# Altium PCB Memory-A2.PcbDoc
Units mil, origin at the board's own origin, x right, y up, seen from the top; angles counter-clockwise.
Board outline 1315 x 1305 mil, 2 copper layers (Top Layer, Bottom Layer); 17 components, 13 nets, 88 pads, 27 vias.
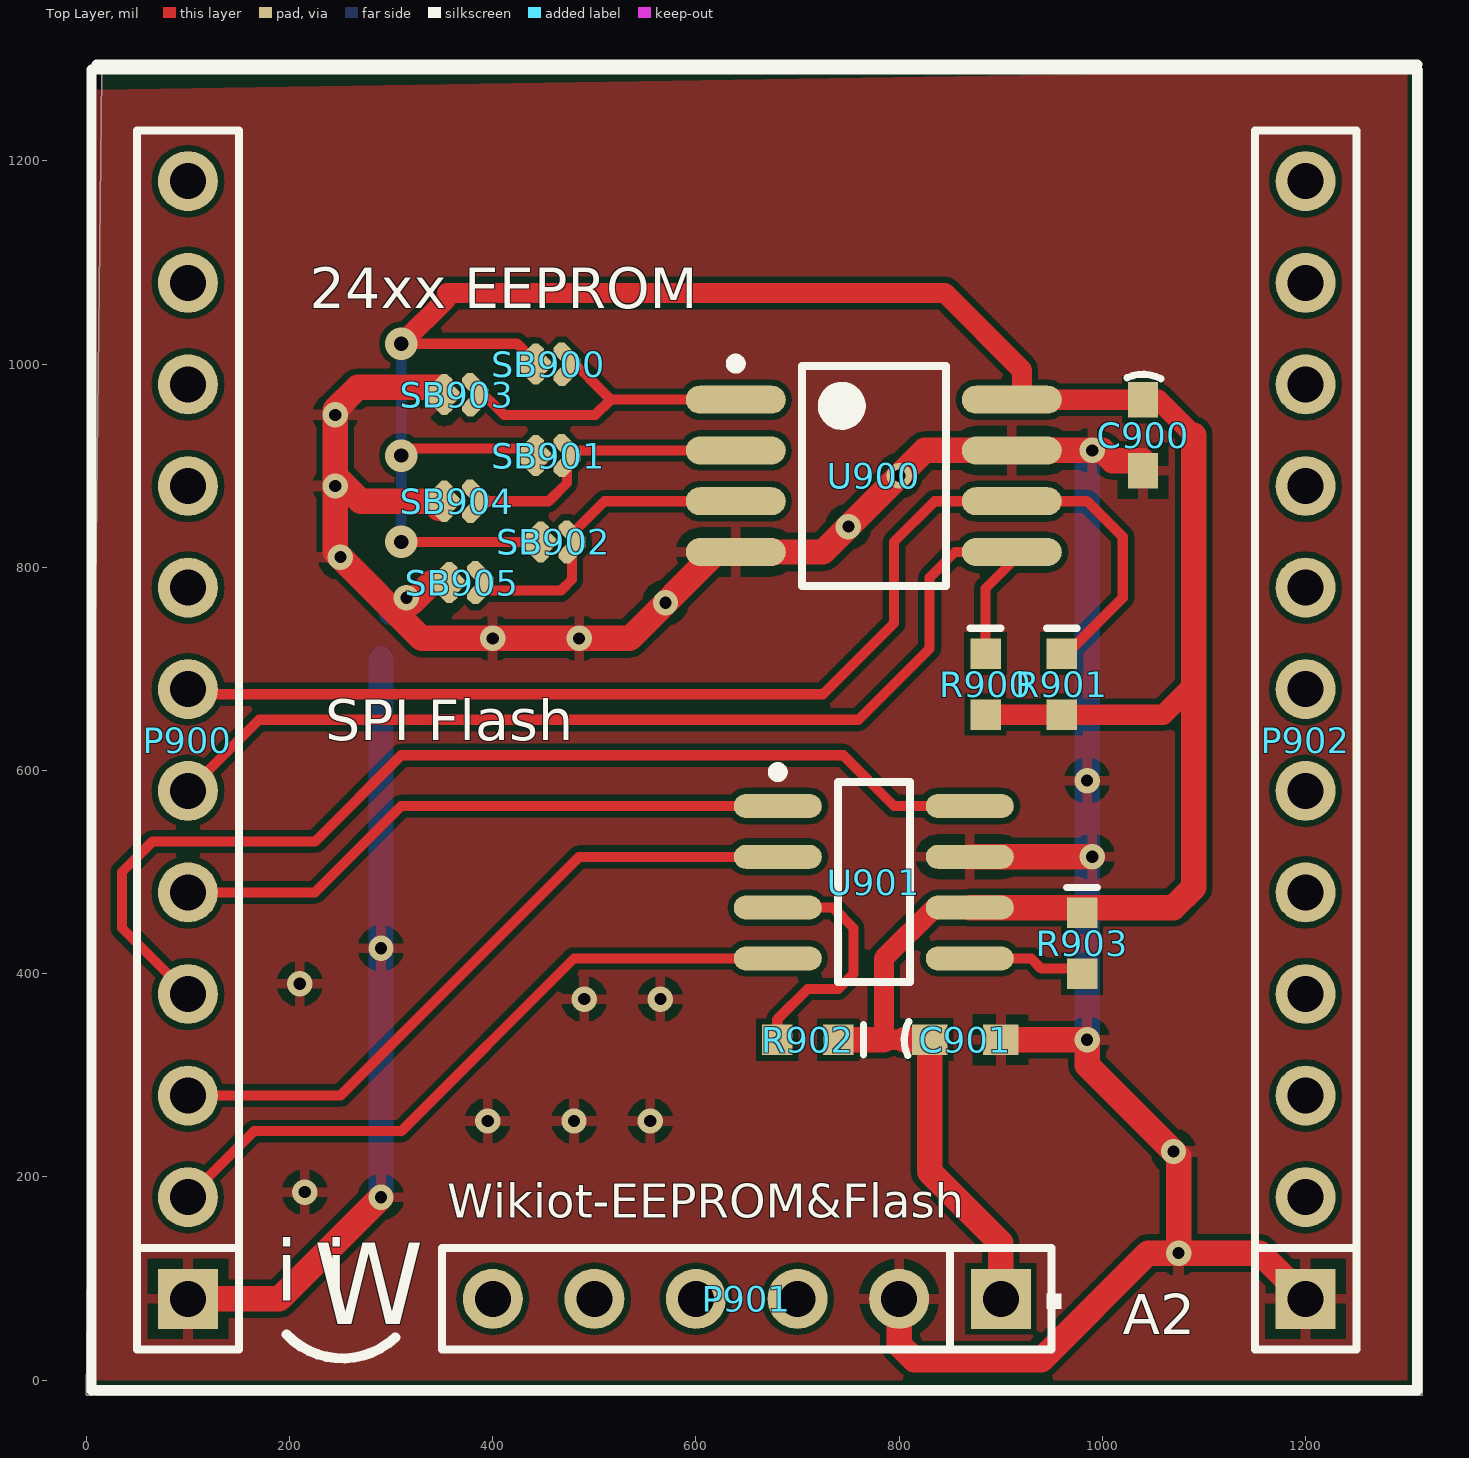
[diagram p0: Top Layer view]
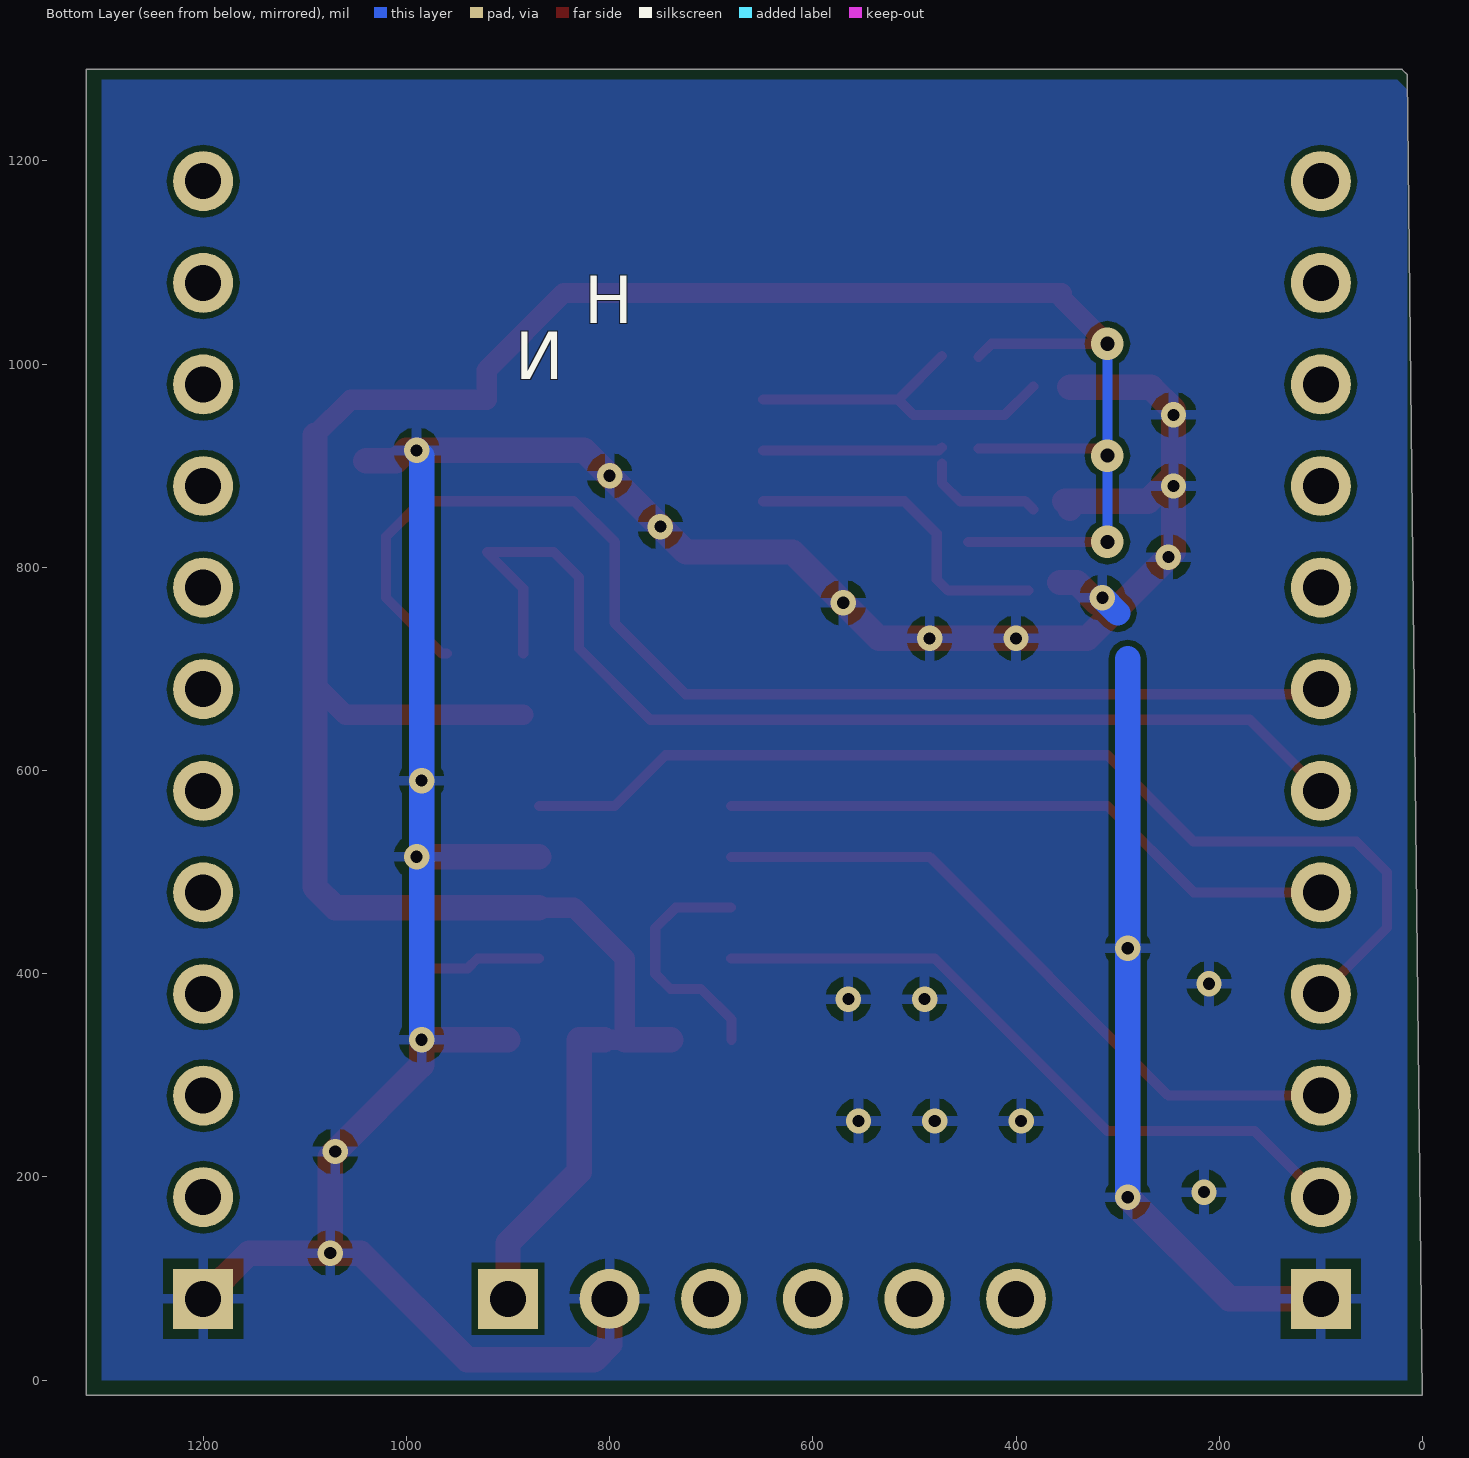
[diagram p1: Bottom Layer view, seen from below]

## Layer stack, top to bottom
Top Solder: solder mask 0.4, Solder Resist, Dk 3.5
Top Layer: signal copper 1.4
Dielectric1: dielectric 12.6, FR-4, Dk 4.8
Bottom Layer: signal copper 1.4
Bottom Solder: solder mask 0.4, Solder Resist, Dk 3.5

## Board outline
15,1285 20,1290 1315,1290 1315,-15 0,-15

## Design rules (kind name [scope] priority, off if disabled: settings)
Clearance [All] p1: gap=6
PolygonConnect [All] p1: connectstyle=Relief reliefconductorwidth=10 reliefentries=4 polygonreliefangle="90 Angle" airgapwidth=10
RoomDefinition EEPROM&Flash [InComponentClass('EEPROM&Flash')] p1: confinementstyle=ConfineIn formatcopy=TRUE lockcomponents=FALSE outline 0,-5 1305,-5 1305,1305 0,1305
RoutingVias [All] p1: holewidth=12 width=25 viastyle="Through Hole" minholewidth=12 minwidth=25 maxholewidth=28 maxwidth=50
SolderMaskExpansion [All] p1: expansion=4
Width [All] p1: maxlimit=55 minlimit=7 preferedwidth=10
30 further rules are at their usual default settings.

## Components (designator, comment, footprint, x,y, rotation, side; value= is the part's Value field where it differs from the comment)
C900 "100nF" C0603L 1040,930 r270 top
C901 "100nF" C0603L 865,335 r0 top
P900 "Synio Header-L 12-Pin" HDR1X12/2.54MM 100,80 r90 top
P901 "Synio Power Header 6 Pin" HDR1X6/2.54MM 900,80 r180 top
P902 "Synio Header-R 12-Pin" HDR1X12/2.54MM 1200,80 r90 top
R900 "1K" R0603 885,685 r270 top
R901 "1K" R0603 960,685 r270 top
R902 "1K" R0603 710,335 r180 top
R903 "1K" R0603 980,430 r270 top
SB900 "Circuit Breaker" JP2_SMD 455,1000 r180 top
SB901 "Circuit Breaker" JP2_SMD 455,910 r180 top
SB902 "Circuit Breaker" JP2_SMD 460,825 r180 top
SB903 "Circuit Breaker" JP2_SMD 365,970 r180 top
SB904 "Circuit Breaker" JP2_SMD 365,865 r180 top
SB905 "Circuit Breaker" JP2_SMD 370,785 r180 top
U900 "AT24C32" SO8W_M 775,890 r0 top
U901 "AT45DB041" SO8_N 775,490 r0 top

## Footprints (in the part's own frame and the unit in brackets; to place one, negate y for a bottom-side part, rotate by r counter-clockwise, add the part's x,y. Pads: shape width x height; smd on the part's side, far side on the other; paste and mask are expansions set on the pad)
C0603L [mil]
  rect 35x30 smd: 1(-35,0) 2(35,0)
  silkscreen extent -60,-16 -56,18, body extent -31,-16 32,15, height 24
HDR1X6/2.54MM [mm] "Connector; Header; 6 Position"
  rect 1.5x1.5 hole 0.9: 1(0,0)
  round 1.5 hole 0.9: 2(2.54,0) 3(5.08,0) 4(7.62,0) 5(10.16,0) 6(12.7,0)
  silkscreen extent -1.52,-1.27 13.97,1.27, body extent -1.32,-1.5 13.92,1.42, height 8.51
HDR1X12/2.54MM [mm] "Connector; Header; 12 Position"
  rect 1.5x1.5 hole 0.9: 1(0,0)
  round 1.5 hole 0.9: 2(2.54,0) 3(5.08,0) 4(7.62,0) 5(10.16,0) 6(12.7,0) 7(15.24,0) 8(17.78,0) 9(20.32,0) 10(22.86,0) 11(25.4,0) 12(27.94,0)
  silkscreen extent -1.27,-1.27 29.21,1.27, body extent -1.29,-1.48 29.19,1.44, height 8.51
JP2_SMD [mil]
  oct 15x30 smd rot 45: 1(-18,-8) 2(18,7)
  oct 15.75x30 smd rot 135: 1(-18,8)
  rect 26x26 smd rot 45: 2(13,0)
  oct 15x30 smd rot 135: 2(18,-7)
R0603 [mil]
  rect 30x30 smd: 1(-30,0) 2(30,0)
  silkscreen extent -55,-15 -55,15, body extent -31,-16 32,15, height 18
SO8_N [mm] "8-Pin Small Outline Integrated Circuit 1.27 mm Pitch, IPC Medium Density"
  oval 2.2x0.6 smd: 1(-2.4,1.905) 2(-2.4,0.635) 3(-2.4,-0.635) 4(-2.4,-1.905) 5(2.4,-1.905) 6(2.4,-0.635) 7(2.4,0.635) 8(2.4,1.905)
  silkscreen extent -2.52,-2.5 0.9,2.88, body extent -1.95,-2.45 1.95,2.45, height 1.75
SO8W_M [mm] "8-Pin Small Outline Package 1.27 mm Pitch, IPC Low Density"
  oval 2.5x0.7 smd: 1(-3.45,1.905) 2(-3.45,0.635) 3(-3.45,-0.635) 4(-3.45,-1.905) 5(3.45,-1.905) 6(3.45,-0.635) 7(3.45,0.635) 8(3.45,1.905)
  silkscreen extent -3.57,-2.75 1.8,2.93, body extent -2.73,-2.75 2.73,2.75, height 2.13

## Part data
C900 C901: library part Cap, "Capacitor"
P900: "Synio Header-L, 12-Pin"
P902: "Synio Header-R, 12-Pin"
R900 R901 R902 R903: library part Res2, "Resistor"
U900: library part At24CXX, "IIC EEPROM"
U901: "4M Serial Flash"

## Via types
v1: diameter 25, hole 12, Top Layer to Bottom Layer, 24 vias
v2: diameter 32, hole 14, Top Layer to Bottom Layer, 3 vias

## Nets (pads, with @x,y where several pads share a name; then routed paths per layer and width w, separated by ;. In a path a pad name is that pad's centre, name@x,y a point inside that pad or via, vN(x,y) a via of type N, cw(c..) or ccw(c..) an arc to the next point about the centre after c; other vN are vias at no path point)
D3V3: C900.1 C901.1 P901.1 R900.2 R901.2 R902.1 R903.1 SB900.2 SB901.2 SB902.2 U900.8 U901.6 | length 2913.5
  Top Layer w10: v2@305,825 v2(310,825) SB902.2@447,825 ; v2(310,1020) 424,1020 SB900.2@437,1007 ; v2@312,917 SB901.2@437,917
  Top Layer w20: v2(310,1020) 355,1065 ; 355,1070 845,1070 920.83,994.17 920.83,965 1055,965 1090,930 ; 805,335 785,335 785,415 835,465 U901.6 ; R900.2 R901.2 1060,655 1090,685
  Top Layer w25: R902.1 785,335 ; 805,335 C901.1 830,205 900,135 P901.1 ; U901.6 R903.1@975,465 ; R903.1@980,465 1070,465 1090,485 1090,685 1090,930
  Bottom Layer w10: v2(310,825) v2(310,910) v2(310,1020)
GND: C900.2 C901.2 P900.1 P901.2 P902.1 SB903.2 SB904.2 SB905.2 U900.4 U900.7 U901.7 | length 3657.1
  Top Layer w25: P900.1 190,80 v1(290,180) ; v1@320,765 340,785 SB905.2@357,785 ; SB904.2@347,858 SB904.2@347,859.5 ; SB903.2@347,977 267,977 245,955 v1@245,890 ; SB904.2@352,865 270,865 v1@245,890 ; P901.2 800,35 815,20 940,20 1045,125 v1(1075,125) ; U901.7 v1(990,515) ; C901.2 v1(985,335) 985,310 v1(1070,225) 1075,220 v1(1075,125) ; C900.2@1040,905 1010,905 1000,915 v1(990,915) U900.7 825,915 725,815 620,815 535,730 330,730 245,815 v1@245,890 ; P902.1 1155,125 v1(1075,125)
  Bottom Layer w25: v1(290,180) 290,710 ; 300,755 v1(315,770) ; v1(985,335) v1(985,590) 985,910 v1(990,915)
  other v1: 215,185 395,255 480,255 555,255 490,375 565,375 210,390 290,425 400,730 485,730 570,765 250,810 750,840 245,880 800,890 245,950
NetP900_2: P900.2 U901.4 | length 677.9
  Top Layer w10: P900.2 165,245 310,245 480,415 U901.4
NetP900_3: P900.3 U901.2 | length 677.9
  Top Layer w10: P900.3 250,280 485,515 U901.2
NetP900_4: P900.4 U901.8 | length 1049.8
  Top Layer w10: P900.4 35,445 35,500 65,530 225,530 310,615 745,615 795,565 U901.8
NetP900_5: P900.5 U901.1 | length 615.7
  Top Layer w10: P900.5 225,480 310,565 U901.1
NetP900_6: P900.6 R900.1 U900.5 | length 1074
  Top Layer w10: P900.6 170,650 760,650 830,720 830,790 855,815 920.83,815 885,779.17 R900.1
NetP900_7: P900.7 R901.1 U900.6 | length 1204.9
  Top Layer w10: P900.7 105,675 725,675 795,745 795,825 835,865 985,865 1020,830 1020,770 965,715 R901.1
NetR902_2: R902.2 U901.3 | length 241.4
  Top Layer w10: R902.2 680,355 710,385 740,385 755,400 755,445 735,465 U901.3
NetR903_2: R903.2 U901.5 | length 114.7
  Top Layer w10: U901.5 930,415 940,405 R903.2@980,405
NetSB900_1: SB900.1 SB903.1 U900.1 | length 344.8
  Top Layer w10: SB903.1@383,978 411,950 501,950 516,965 ; SB900.1@473,1008 516,965 ; U900.1@649.17,965 516,965
NetSB901_1: SB901.1 SB904.1 U900.2 | length 297.2
  Top Layer w10: SB904.1@383,857 391,865 455,865 473,883 SB901.1@473,902 ; SB901.1@473,918 476,915 U900.2@649.17,915
NetSB902_1: SB902.1 SB905.1 U900.3 | length 324
  Top Layer w10: SB905.1@388,777 467,777 478,788 478,817 478,833 510,865 U900.3@649.17,865
pads on no net: P900.8 P900.9 P900.10 P900.11 P900.12 P901.3 P901.4 P901.5 P901.6 P902.2 P902.3 P902.4 P902.5 P902.6 P902.7 P902.8 P902.9 P902.10 P902.11 P902.12

## Polygon pours and split planes (outlines as drawn)
GND on Bottom Layer "Top Layer-No Net" (solid, remove dead copper, pour order 4): 15,1270 25,1280 1300,1280 1300,0 1305,-5 1300,0 15,0
GND on Top Layer "Top Layer-No Net" (solid, remove dead copper, pour order 2): 10,1270 10,0 1300,0 1305,-5 1300,0 1300,1290

## Silkscreen, mask and mechanical layers (free items; w line width, h text height)
Top Overlay:
  lines w10: 5,-10 5,1290 1305,1290 ; 10,-10 1310,-10 1310,1290 ; 10,1295 1310,1295 ; 197,45 ccw(c252,97) 304,42
  text "24xx EEPROM" at 220,1055 h40
  text "SPI Flash" at 235,630 h40
  text "Wikiot-EEPROM&Flash" at 355,160 h33.46
  text "i i" at 186,78 h60
  text "W" at 224,55 h80
  text "A2" at 1020,45 h39.37
Bottom Overlay:
  text "H" at 825,1025 h80
  text "N" at 845,970 h80